# EAGLE board MCU board ATmega328p v2.3 (EAGLE 9.2.1)

Size 160 x 100 mm. Coordinates in mm from the lower left corner, seen from the top.
Outline: 0,0 160,0 160,100 0,100 0,0
Copper layers (1*16): Top 0.035mm / dielectric 1.5mm / Bottom 0.035mm
Design rules "default": minimum track width 6mil, minimum drill 0.35mm, track to track 6mil, track to pad 6mil, pad to pad 6mil, via to via 6mil, smd to smd 6mil, copper to edge 40mil, drill to drill 6mil, minimum pad ring 10mil, minimum via ring 8mil, stop-mask expansion 4mil, vias tented up to drill 0mil, thermal gap 10mil

## Footprints (pad centres in the part's own frame; a part is rotated, then mirrored left to right if it is on the bottom)
2,54/2,0(HALFHOLE)H+V = drill 2.032 pad 3.048: P$1 0,0 | hole 2.032: 0,0
CAPPM3216X180N = smd 1.7 x 1.25: 1 -1.35,0; 2 1.35,0
CAPC3216X229N = smd 1.02 x 1.82: 1 -1.4,0; 2 1.4,0
SON75P200X200X100-6N = smd 0.95 x 0.4: 1 -0.9,0.75; 2 -0.9,0; 3 -0.9,-0.75; 4 0.9,-0.75; 5 0.9,0; 6 0.9,0.75
0154001.DRT = smd 4.242 x 3.81: 1 -3.188,0; 2 3.188,0
QFN45P400X400X100-29N = smd 0.7 x 0.25: 1 -2.05,1.35; 2 -2.05,0.9; 3 -2.05,0.45; 4 -2.05,0; 5 -2.05,-0.45; 6 -2.05,-0.9; 7 -2.05,-1.35; 15 2.05,-1.35; 16 2.05,-0.9; 17 2.05,-0.45; 18 2.05,0; 19 2.05,0.45; 20 2.05,0.9; 21 2.05,1.35 | smd 0.25 x 0.7: 8 -1.35,-2.05; 9 -0.9,-2.05; 10 -0.45,-2.05; 11 0,-2.05; 12 0.45,-2.05; 13 0.9,-2.05; 14 1.35,-2.05; 22 1.35,2.05; 23 0.9,2.05; 24 0.45,2.05; 25 0,2.05; 26 -0.45,2.05; 27 -0.9,2.05; 28 -1.35,2.05 | smd 2.45 x 2.45: 29 0,0
SOT230P700X170-4N = smd 1.75 x 0.95: 1 -3.15,2.3; 2 -3.15,0; 3 -3.15,-2.3 | smd 1.75 x 3.25: 4 3.15,0
QFN65P600X600X100-29N = smd 1.05 x 0.35: 1 -2.85,1.95; 2 -2.85,1.3; 3 -2.85,0.65; 4 -2.85,0; 5 -2.85,-0.65; 6 -2.85,-1.3; 7 -2.85,-1.95; 15 2.85,-1.95; 16 2.85,-1.3; 17 2.85,-0.65; 18 2.85,0; 19 2.85,0.65; 20 2.85,1.3; 21 2.85,1.95 | smd 0.35 x 1.05: 8 -1.95,-2.85; 9 -1.3,-2.85; 10 -0.65,-2.85; 11 0,-2.85; 12 0.65,-2.85; 13 1.3,-2.85; 14 1.95,-2.85; 22 1.95,2.85; 23 1.3,2.85; 24 0.65,2.85; 25 0,2.85; 26 -0.65,2.85; 27 -1.3,2.85; 28 -1.95,2.85 | smd 4.2 x 4.2: 29 0,0
2X3-NS = drill 1.016 pad 1.88: 1 -2.54,-1.27; 2 -2.54,1.27; 3 0,-1.27; 4 0,1.27; 5 2.54,-1.27; 6 2.54,1.27
RESC0603X28N = smd 0.625 x 0.4: 1 -0.412,0; 2 0.412,0
SMD1,27-2,54 = smd 1.27 x 2.54: 1 0,0
FA-20H = smd 1.2 x 1.1: 1 0.8,0.75; 2 2.5,0.75; 3 2.5,2.15; 4 0.8,2.15

## Placement (x,y rotation side)
12V  [2,54/2,0(HALFHOLE)H+V]  -35.56,31.75 0 top  (outside the outline)
C1  10uF  [CAPPM3216X180N]  -27.94,36.83 0 top  (outside the outline)
C2  22pF  [CAPC3216X229N]  -34.29,43.18 0 top  (outside the outline)
C3  22pF  [CAPC3216X229N]  -39.37,43.18 0 top  (outside the outline)
C4  10uF  [CAPPM3216X180N]  -33.02,36.83 0 top  (outside the outline)
C9  22pF  [CAPC3216X229N]  -44.45,43.18 0 top  (outside the outline)
C10  22pF  [CAPC3216X229N]  -15.24,45.72 0 top  (outside the outline)
C11  0.1uF_12  [CAPC3216X229N]  -40.64,36.83 0 top  (outside the outline)
C14  0.1uF_12  [CAPC3216X229N]  -17.78,40.64 0 top  (outside the outline)
C15  0.1uF_12  [CAPC3216X229N]  -26.67,40.64 0 top  (outside the outline)
C16  0.1uF_12  [CAPC3216X229N]  -35.56,40.64 0 top  (outside the outline)
C17  0.1uF_12  [CAPC3216X229N]  -44.45,40.64 0 top  (outside the outline)
C18  0.1uF_12  [CAPC3216X229N]  -17.78,43.18 0 top  (outside the outline)
C19  0.1uF_12  [CAPC3216X229N]  -26.67,43.18 0 top  (outside the outline)
DOTSTAR  COM-14608  [SON75P200X200X100-6N]  -19.05,36.83 0 top  (outside the outline)
F1  0154005.DRT  [0154001.DRT]  -19.05,21.59 0 top  (outside the outline)
I/O_AD0  [2,54/2,0(HALFHOLE)H+V]  -15.24,31.75 0 top  (outside the outline)
I/O_AD1  [2,54/2,0(HALFHOLE)H+V]  -20.32,31.75 0 top  (outside the outline)
I/O_AD2  [2,54/2,0(HALFHOLE)H+V]  -25.4,31.75 0 top  (outside the outline)
I/O_AD3  [2,54/2,0(HALFHOLE)H+V]  -30.48,31.75 0 top  (outside the outline)
I/O_AD4_SDA  [2,54/2,0(HALFHOLE)H+V]  -31.75,21.59 0 top  (outside the outline)
I/O_AD5_SCL  [2,54/2,0(HALFHOLE)H+V]  -40.64,21.59 0 top  (outside the outline)
I/O_CANH  [2,54/2,0(HALFHOLE)H+V]  -36.83,26.67 0 top  (outside the outline)
I/O_CANL  [2,54/2,0(HALFHOLE)H+V]  -43.18,26.67 0 top  (outside the outline)
I/O_D0_RX  [2,54/2,0(HALFHOLE)H+V]  -24.13,26.67 0 top  (outside the outline)
I/O_D1_TX  [2,54/2,0(HALFHOLE)H+V]  -30.48,26.67 0 top  (outside the outline)
I/O_D2_INT  [2,54/2,0(HALFHOLE)H+V]  -17.78,26.67 0 top  (outside the outline)
IC1  ATMEGA328P-MMH  [QFN45P400X400X100-29N]  -39.37,13.97 0 top  (outside the outline)
IC2  MIC5239-5.0YS_TR  [SOT230P700X170-4N]  -21.59,15.24 0 top  (outside the outline)
IC3  MCP25625-E_ML  [QFN65P600X600X100-29N]  -39.37,3.81 0 top  (outside the outline)
J1  AVR_SPI_PROG_3X2NS  [2X3-NS]  -26.67,5.08 0 top  (outside the outline)
R1  10KΩ  [RESC0603X28N]  -21.59,45.72 0 top  (outside the outline)
R2  10KΩ  [RESC0603X28N]  -27.94,45.72 0 top  (outside the outline)
RES_PAD1  [SMD1,27-2,54]  -13.97,3.81 0 top  (outside the outline)
RES_PAD2  [SMD1,27-2,54]  -17.78,3.81 0 top  (outside the outline)
U$1  FA-20H  [FA-20H]  -41.91,30.48 0 top  (outside the outline)
U$2  FA-20H  [FA-20H]  -46.99,30.48 0 top  (outside the outline)

## Library data of the parts
12V I/O_AD0 I/O_AD1-I/O_AD3 I/O_AD4_SDA I/O_AD5_SCL I/O_CANH I/O_CANL I/O_D0_RX I/O_D1_TX I/O_D2_INT = wirepad_edit
C1 C4 = T491A106K016AT; ARROW_PART_NUMBER: T491A106K016AT; ARROW_PRICE-STOCK: https://www.arrow.com/en/products/t491a106k016at/kemet-corporation; DESCRIPTION: Capacitor Tantalum T491 Case A 16V 10uF Kemet ????10% 10????F 16 V dc SMD Tantalum Electrolytic Capacitor, A ESR 7???? +125????C T491; HEIGHT: 1.8mm; MANUFACTURER_NAME: Kemet; MANUFACTURER_PART_NUMBER: T491A106K016AT; RS_PART_NUMBER: 1696687; RS_PRICE-STOCK: http://uk.rs-online.com/web/p/products/1696687
C2 C3 C9-C11 C14-C19 = 12066D106KAT2A; ALLIED_NUMBER: 70002294; ALLIED_PRICE-STOCK: http://www.alliedelec.com/avx-12066d106kat2a/70002294/; ARROW_PART_NUMBER: 12066D106KAT2A; ARROW_PRICE-STOCK: http://uk.rs-online.com/web/p/products/1356756; DESCRIPTION: AVX 10uF /-10% 6.3 V dc X5R Dielectric SMD Ceramic Multilayer Capacitor 1206; HEIGHT: 2.29mm; MANUFACTURER_NAME: AVX; MANUFACTURER_PART_NUMBER: 12066D106KAT2A; RS_PART_NUMBER: 1356756; RS_PRICE-STOCK: http://uk.rs-online.com/web/p/products/1356756
DOTSTAR = APA102–2020; ARROW_PART_NUMBER: COM-14608; DESCRIPTION: SparkFun Accessories SMD LED - RGB APA102-2020; HEIGHT: 1mm; MANUFACTURER_NAME: SparkFun; MANUFACTURER_PART_NUMBER: COM-14608
F1 = 0154005(Fuseholder)DRT; ALLIED_NUMBER: 70184875; ALLIED_PRICE-STOCK: https://www.alliedelec.com/littelfuse-0154005-drt/70184875/; ARROW_PART_NUMBER: 0154005.DRT; ARROW_PRICE-STOCK: https://www.arrow.com/en/products/0154005.drt/littelfuse; DESCRIPTION: Littelfuse 5A T Surface Mount Fuse, 125V ac/dc; HEIGHT: mm; MANUFACTURER_NAME: LITTELFUSE; MANUFACTURER_PART_NUMBER: 0154005.DRT; RS_PART_NUMBER: 2196260P; RS_PRICE-STOCK: http://uk.rs-online.com/web/p/products/2196260P
IC1 = ATMEGA328P-MMH; ARROW_PART_NUMBER: ATMEGA328P-MMH; ARROW_PRICE-STOCK: https://www.arrow.com/en/products/atmega328p-mmh/microchip-technology; DESCRIPTION: Atmel ATMEGA328P-MMH, 8bit AVR Microcontroller, 20MHz, 32 kB Flash, 28-Pin QFN; HEIGHT: 1mm; MANUFACTURER_NAME: Microchip; MANUFACTURER_PART_NUMBER: ATMEGA328P-MMH; RS_PART_NUMBER: 1310272P; RS_PRICE-STOCK: http://uk.rs-online.com/web/p/products/1310272P
IC2 = MIC5239-5.0YS_TR; ARROW_PART_NUMBER: MIC5239-5.0YS TR; ARROW_PRICE-STOCK: http://uk.rs-online.com/web/p/products/7275535P; DESCRIPTION: LDO Regulator Pos 5V 0.5A Micrel MIC5239-5.0YS TR, LDO Voltage Regulator, 500mA, 5 V 1%, 2.3 30 Vin, 3 + Tab-Pin SOT-223; HEIGHT: 1.7mm; MANUFACTURER_NAME: Micrel; MANUFACTURER_PART_NUMBER: MIC5239-5.0YS TR; RS_PART_NUMBER: 7275535P; RS_PRICE-STOCK: http://uk.rs-online.com/web/p/products/7275535P
IC3 = MCP25625-E_ML; ALLIED_NUMBER: 70431541; ALLIED_PRICE-STOCK: http://www.alliedelec.com/microchip-technology-inc-mcp25625-e-ml/70431541/; ARROW_PART_NUMBER: MCP25625-E/ML; ARROW_PRICE-STOCK: https://www.arrow.com/en/products/mcp25625-eml/microchip-technology; DESCRIPTION: CAN Controller with Transceiver QFN28 Microchip MCP25625-E/ML, CAN Controller, 28-Pin QFN; HEIGHT: 1mm; MANUFACTURER_NAME: Microchip; MANUFACTURER_PART_NUMBER: MCP25625-E/ML; RS_PART_NUMBER: 1654104; RS_PRICE-STOCK: http://uk.rs-online.com/web/p/products/1654104
J1 = SparkFun-Connectors
R1 R2 = CPF0201D10KC1; ARROW_PART_NUMBER: CPF0201D10KC1; ARROW_PRICE-STOCK: http://uk.rs-online.com/web/p/products/7549833; DESCRIPTION: TE Connectivity CPF Series Thin Film Surface Mount Fixed Resistor 0201 Case 10k 0.5% 0.031W 50ppm/C; HEIGHT: 0.28mm; MANUFACTURER_NAME: TE Connectivity; MANUFACTURER_PART_NUMBER: CPF0201D10KC1; RS_PART_NUMBER: 7549833; RS_PRICE-STOCK: http://uk.rs-online.com/web/p/products/7549833
RES_PAD1 RES_PAD2 = wirepad
U$1 U$2 = FA-20H 16.0000MF20X-B

## Nets
5V: C1.1 C11.2 C14.2 C15.2 C17.2 C18.2 C19.2 DOTSTAR.4 IC1.3 IC1.16 IC1.17 IC2.3 IC3.3 IC3.11 IC3.19 J1.2 R1.2 R2.2
12V_FUSED: C4.2 F1.2 IC2.1
12V_UNFUSED: 12V.P$1 F1.1
CAN_CS: IC1.11 IC3.1
CAN_INIT: IC1.28 IC3.25
CAN_MISO: IC1.14 IC3.28
CAN_MOSI: IC1.13 IC3.27
CAN_OSC1: C9.2 IC3.21 U$1.1
CAN_OSC2: C10.2 IC3.20 U$1.3
CANH: I/O_CANH.P$1 IC3.13
CANL: I/O_CANL.P$1 IC3.12
DOTS_CS: DOTSTAR.1 IC1.10
GND: C1.2 C2.1 C3.1 C4.1 C9.1 C10.1 C11.1 C14.1 C15.1 C16.1 C17.1 C18.1 C19.1 DOTSTAR.3 IC1.4 IC1.18 IC1.29 IC2.2 IC2.4 IC3.14 IC3.15 IC3.17 IC3.18 IC3.22 J1.6 RES_PAD2.1
I/O_AD0: I/O_AD0.P$1 IC1.19
I/O_AD1: I/O_AD1.P$1 IC1.20
I/O_AD2: I/O_AD2.P$1 IC1.21
I/O_AD3: I/O_AD3.P$1 IC1.22
I/O_AD4_SCL: I/O_AD4_SDA.P$1 IC1.23
I/O_AD5_SCL: I/O_AD5_SCL.P$1 IC1.24
I/O_D0_RX: I/O_D0_RX.P$1 IC1.26
I/O_D1_TX: I/O_D1_TX.P$1 IC1.27
I/O_D2_INT: I/O_D2_INT.P$1 IC1.1
MCP_RESET: C16.2 IC3.2 R2.1
MCU_OSC1: C2.2 IC1.5 U$2.1
MCU_OSC2: C3.2 IC1.6 U$2.3
MISO: J1.1
MOSI: J1.4
RESET_MCU: IC1.25 J1.5 R1.1 RES_PAD1.1
RXCAN: IC3.5 IC3.10
SCK: DOTSTAR.2 IC1.15 IC3.26 J1.3
TXCAN: IC3.4 IC3.16

## Tracks (layer width: path | path; a pad name or v marks a point on that pad's centre or on a via)
5V  (17 unrouted)
12V_FUSED  (2 unrouted)
12V_UNFUSED  (1 unrouted)
CAN_CS  (1 unrouted)
CAN_INIT  (1 unrouted)
CAN_MISO  (1 unrouted)
CAN_MOSI  (1 unrouted)
CAN_OSC1  (2 unrouted)
CAN_OSC2  (2 unrouted)
CANH  (1 unrouted)
CANL  (1 unrouted)
DOTS_CS  (1 unrouted)
GND  (25 unrouted)
I/O_AD0  (1 unrouted)
I/O_AD1  (1 unrouted)
I/O_AD2  (1 unrouted)
I/O_AD3  (1 unrouted)
I/O_AD4_SCL  (1 unrouted)
I/O_AD5_SCL  (1 unrouted)
I/O_D0_RX  (1 unrouted)
I/O_D1_TX  (1 unrouted)
I/O_D2_INT  (1 unrouted)
MCP_RESET  (2 unrouted)
MCU_OSC1  (2 unrouted)
MCU_OSC2  (2 unrouted)
RESET_MCU  (3 unrouted)
RXCAN  (1 unrouted)
SCK  (3 unrouted)
TXCAN  (1 unrouted)